# Allegro board DIF_1V0 - 副本.brd
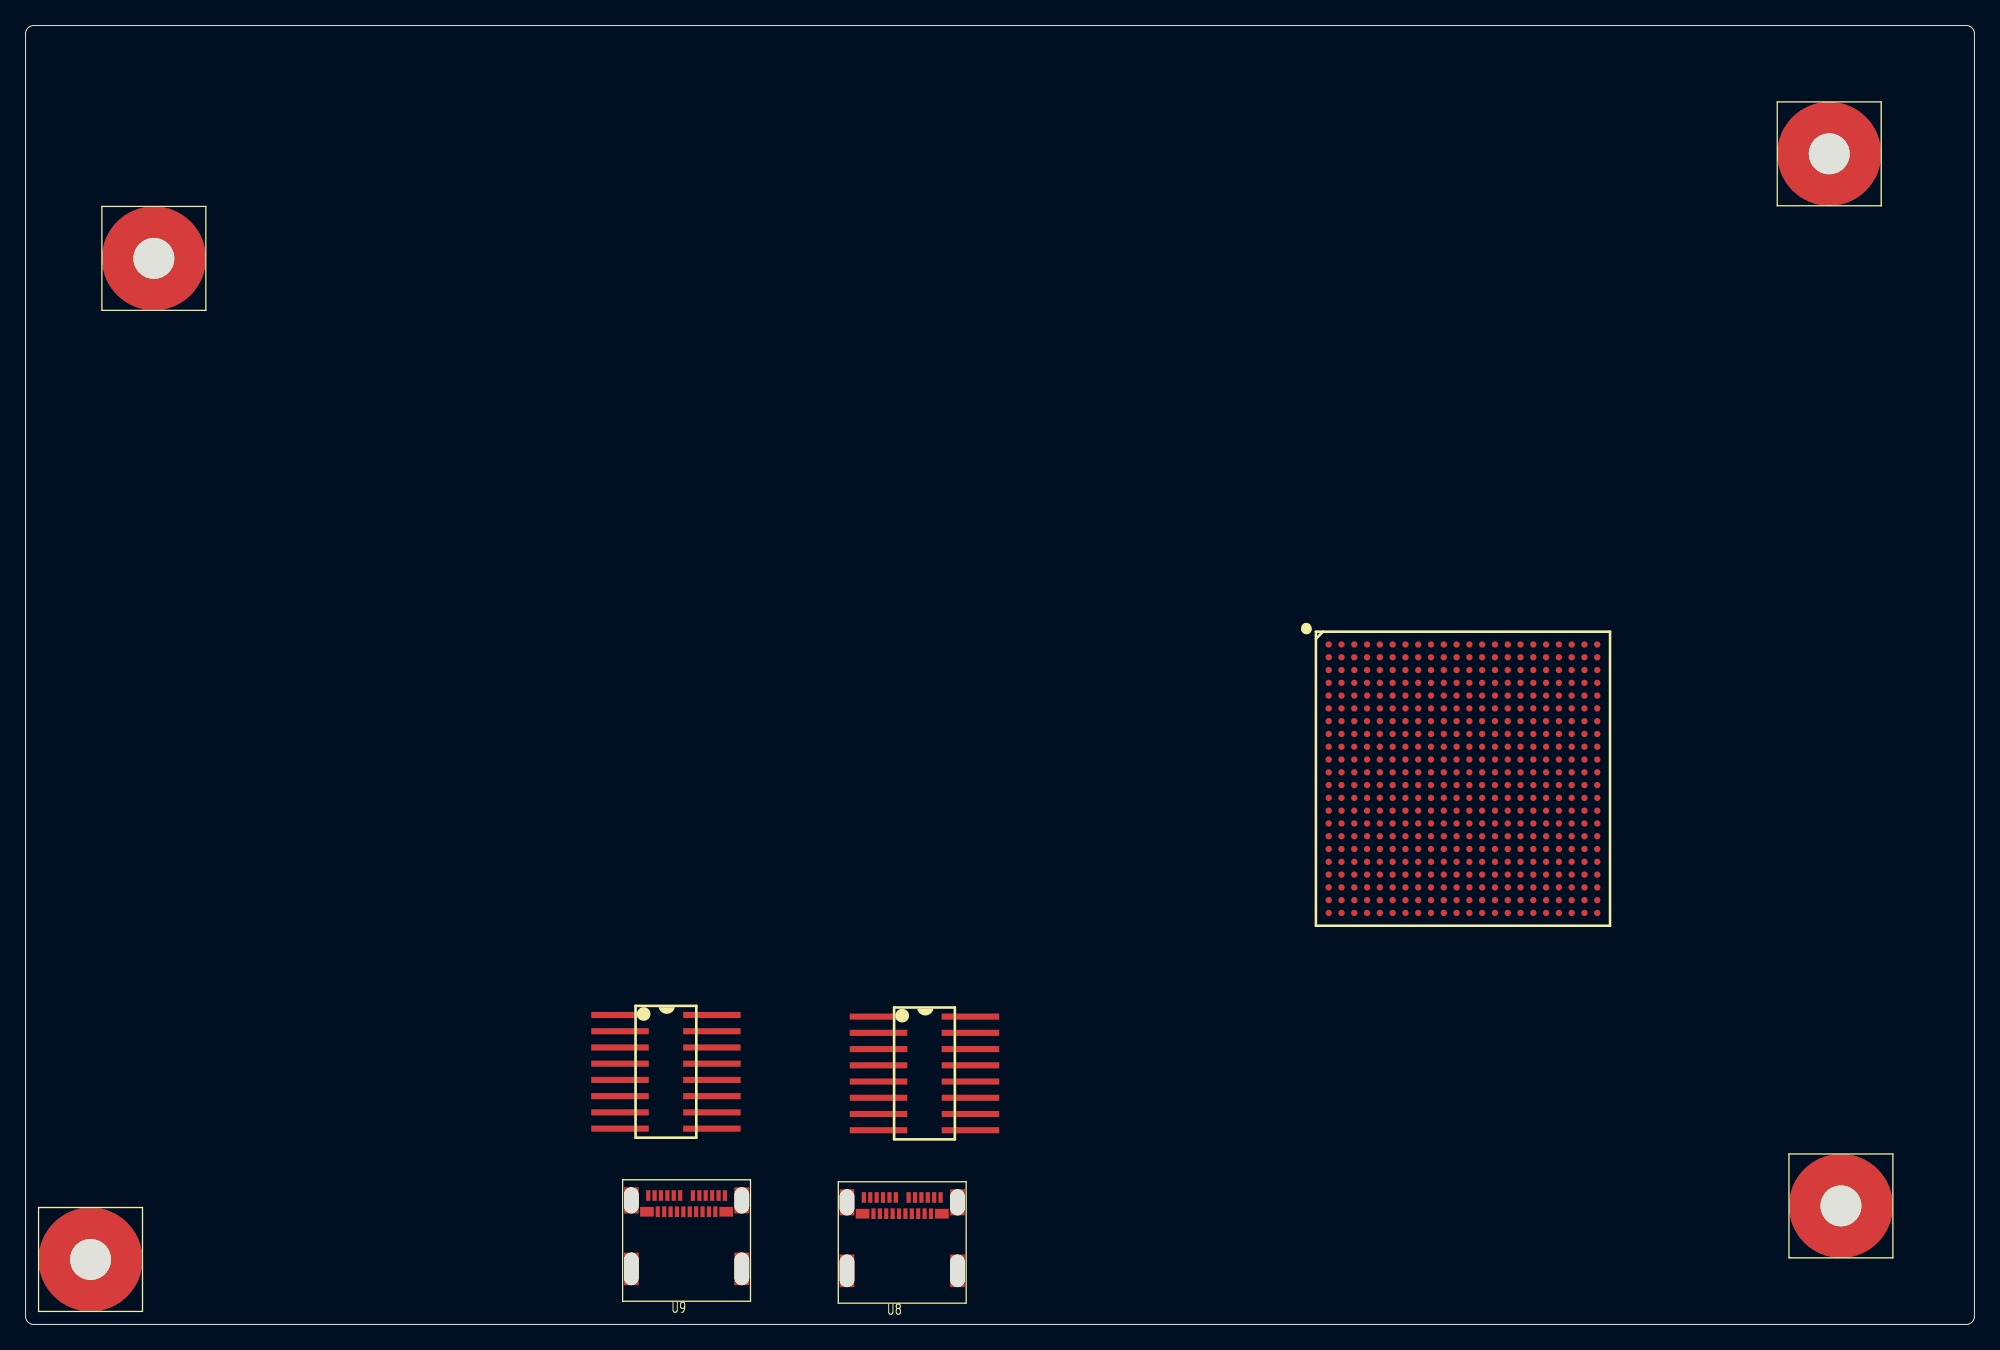
[diagram p0: board, top side]
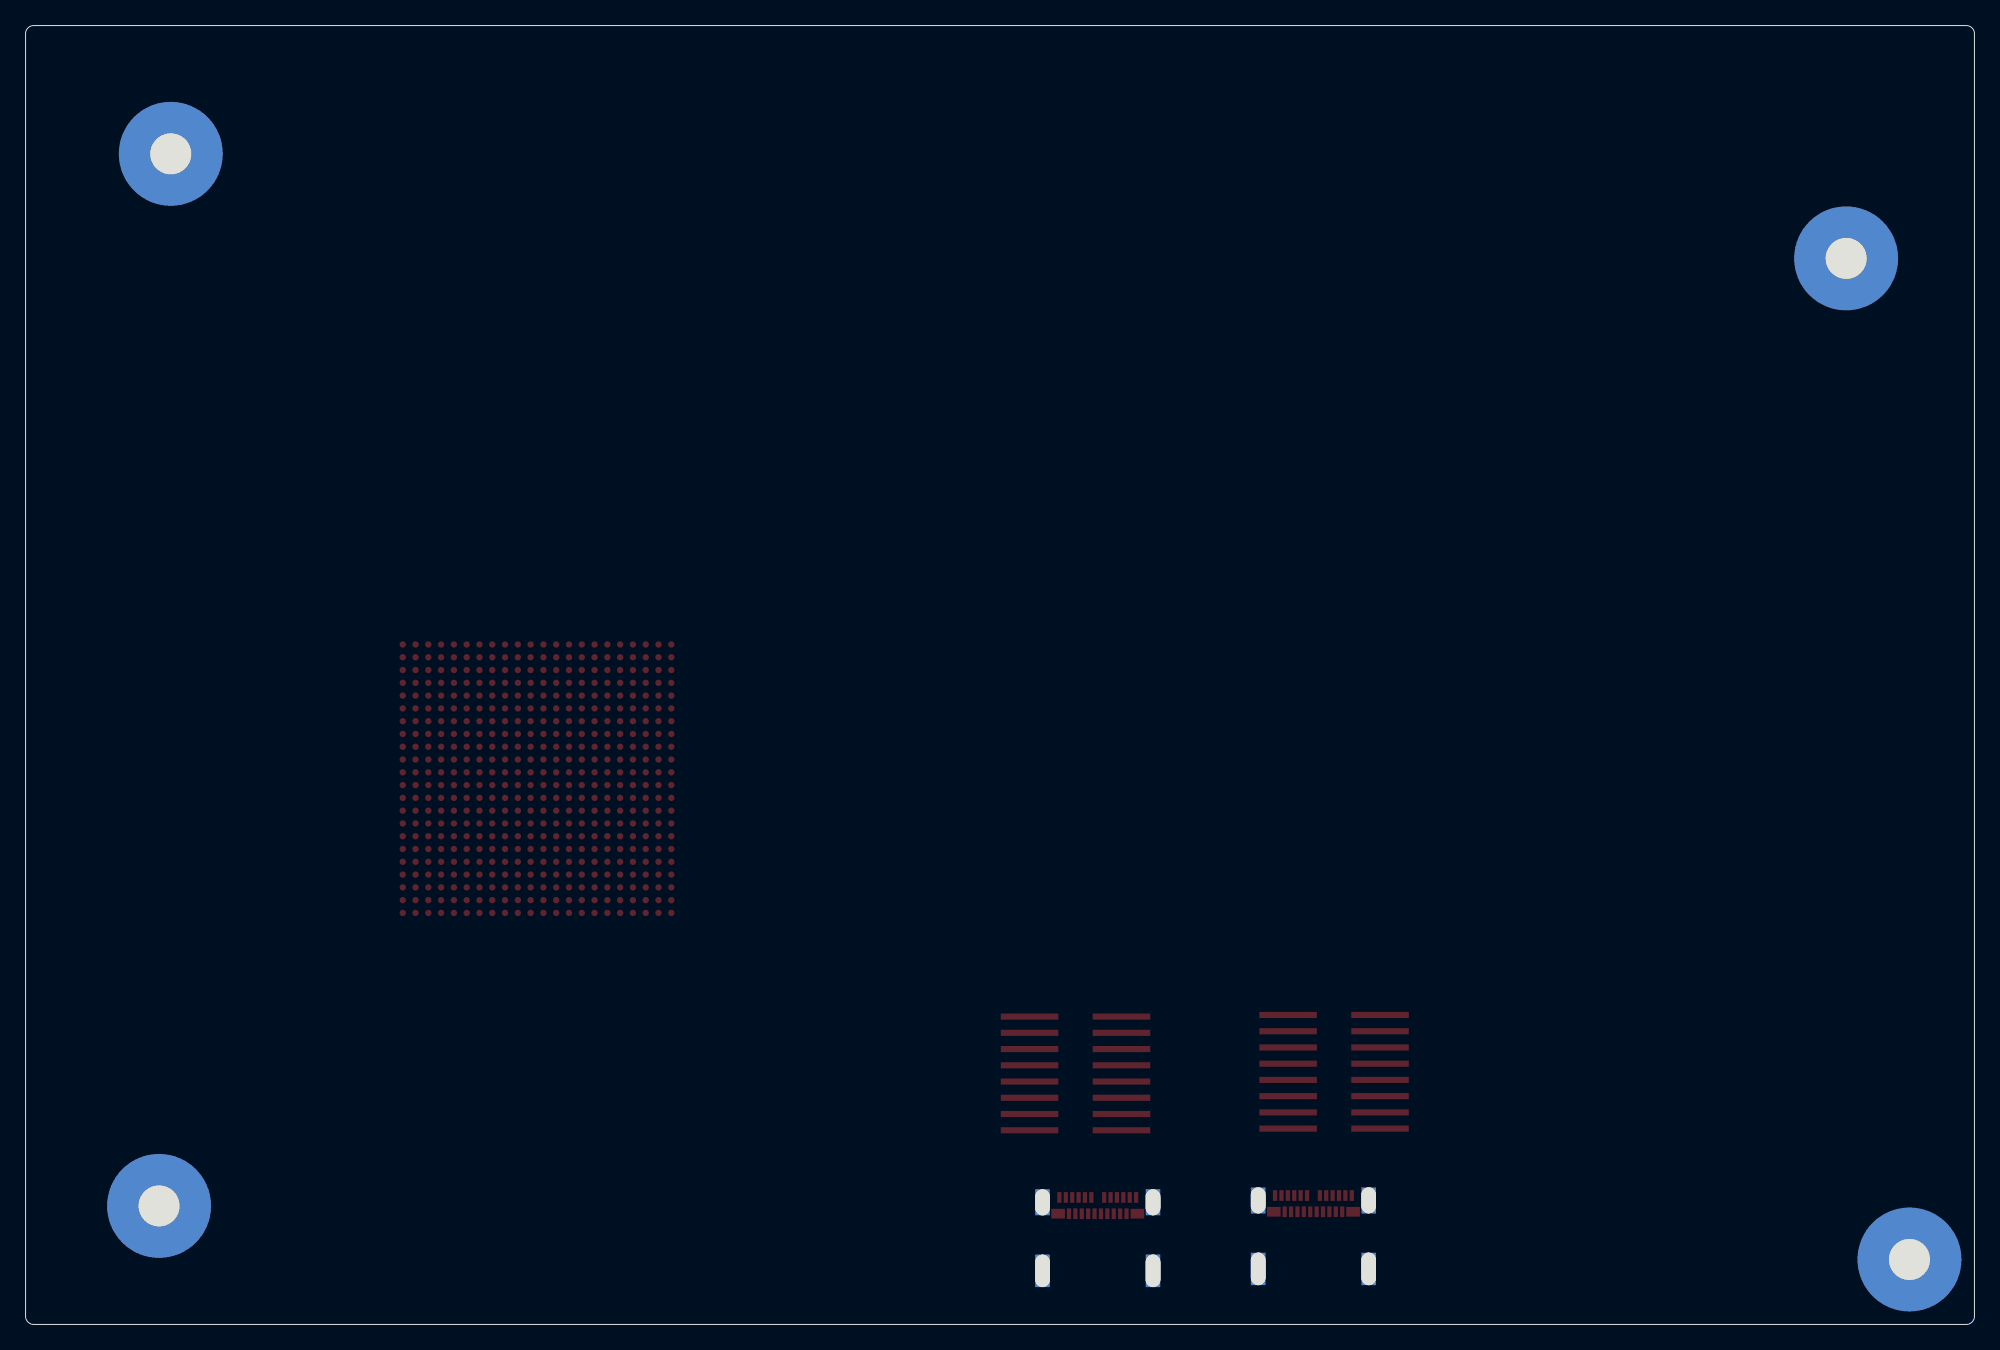
[diagram p1: board, bottom side, seen from below]

Outline 152.4 x 101.6 mm; copper layers: TOP, GND2, ART3, PLANE4, GND6, ART6, PLANE7, BOTTOM. Coordinates in mm from the lower left corner of the outline.
Outline path: 0,100.97 0,0.64 arc(0.19,0.19) 0.64,0 151.76,0 arc(152.21,0.19) 152.4,0.64 152.4,100.97 arc(152.21,101.41) 151.76,101.6 0.64,101.6 arc(0.19,101.41) 0,100.97

## Design rules (mm)
net group 1.2V: nets 1.2V N17024
net group IN_MONITOR: nets IN_MONITOR N16789996
net group IO_PRE_2.5_1: nets IO_PRE_2.5_1 N16790016
net group IO_PRE_2.5_2: nets IO_PRE_2.5_2 N16790125
net group IO_PRE_2.5_3: nets IO_PRE_2.5_3 N16790011
net group IO_PRE_2.5_4: nets IO_PRE_2.5_4 N16790120
net group IO_PRE_2.5_5: nets IO_PRE_2.5_5 N16790006
net group IO_PRE_2.5_6: nets IO_PRE_2.5_6 N16790115
net group IO_PRE_3.3_1: nets IO_PRE_3.3_1 N16783654
net group IO_PRE_3.3_2: nets IO_PRE_3.3_2 N1678375638
net group IO_PRE_3.3_3: nets IO_PRE_3.3_3 N16783650
net group IO_PRE_3.3_4: nets IO_PRE_3.3_4 N1678375636
net group IO_PRE_3.3_5: nets IO_PRE_3.3_5 N16783646
net group IO_PRE_3.3_6: nets IO_PRE_3.3_6 N1678375634
net group N65373: nets N65373 N607665
net group N606320: nets N65361 N606320
net group N16783572: nets N39711 N16783572
net group N16783577: nets N39253 N16783577
net group N16783581: nets N38992 N16783581
net group N16783585: nets N34554 N16783585
net group N16783590: nets N38404 N16783590
net group N16783594: nets N38396 N16783594
net group N16783603: nets N16783603 N16786967
net group N16783607: nets N40733 N16783607
net group N16783611: nets N42476 N16783611
net group N16783616: nets N42251 N16783616
net group N16783620: nets N41303 N16783620
net group N16783637: nets N16783637 N16787030
net group N16783642: nets N16783642 N16787037
net group N16789943: nets N16789943 N16790031
net group N16789945: nets N16789945 N16790036
net group N16789976: nets N33890 N16789976
net group N16789981: nets N28287 N16789981
net group N16789986: nets N27930 N16789986
net group N16789991: nets N27061 N16789991
net group N16790001: nets N29237 N16790001
net group N16790021: nets N72632 N16790021
net group N16790085: nets N33886 N16790085
net group N16790090: nets N27703 N16790090
net group N16790095: nets N26834 N16790095
net group N16790100: nets N73220 N16790100
net group N16790105: nets N29233 N16790105
net group N16790110: nets N71766 N16790110
net group N16790130: nets N16790130 N16790618
net group N16790140: nets N16790140 N16790622
net group N16790145: nets N16790145 N16790624
net group N167837560: nets N39940 N167837560
net group N167837562: nets N39482 N167837562
net group N167837564: nets N73812 N167837564
net group N167837566: nets N38635 N167837566
net group N167837568: nets N34550 N167837568
net group N1678375610: nets N38400 N1678375610
net group N1678375616: nets N40729 N1678375616
net group N1678375618: nets N16788925 N1678375618
net group N1678375620: nets N42480 N1678375620
net group N1678375622: nets N42028 N1678375622
net group N1678375628: nets N16788960 N1678375628
net group N1678375630: nets N64910 N1678375630
net group N1678375632: nets N16788974 N1678375632
net group OUT_CK_5N_1: nets N16790060 OUT_CK_5N_1
net group OUT_CK_5P_1: nets N16789951 OUT_CK_5P_1
net group OUT_CK_40N_1: nets N16790065 OUT_CK_40N_1
net group OUT_CK_40P_1: nets N16789956 OUT_CK_40P_1
net group OUT_RAZ_CHN_N_1: nets N16790080 OUT_RAZ_CHN_N_1
net group OUT_RAZ_CHN_P_1: nets N16789971 OUT_RAZ_CHN_P_1
net group OUT_TRIG_EXT_N_1: nets N16790075 OUT_TRIG_EXT_N_1
net group OUT_TRIG_EXT_P_1: nets N16789966 OUT_TRIG_EXT_P_1
net group OUT_VAL_EVT_N_1: nets N16790070 OUT_VAL_EVT_N_1
net group OUT_VAL_EVT_P_1: nets N16789961 OUT_VAL_EVT_P_1
net group SFP_RD: nets GTP0_RD+ GTP0_RD-
net group SFP_TD: nets GTP0_TD+ GTP0_TD-
net group 3.3V_OUT_DET: nets 3.3V_OUT_DET N16790041 N16790052 N16790150 N16790155
net group N16783598: nets N36779 N16783598 N1678375626
net group N16783624: nets N37008 N16783624 N1678375614
net group N16790026: nets N64906 N16790026 N16790135
net group N1678375612: nets N36552 N1678375612 N1678375624
net group VCC5V0_DET: nets N16783629 N16783633 VCC5V0_DET

## Placement (name value [footprint] x y rotation side)
J14  2mm_Hole  [2MM_HOLE]  5.08 5.08 0 top
J15  2mm_Hole  [2MM_HOLE]  141.96 9.27 0 top
J16  2mm_Hole  [2MM_HOLE]  141.05 91.57 0 top
J17  2mm_Hole  [2MM_HOLE]  10.03 83.39 0 top
U3  XC7A100T  [ARTIX7XCA100T484]  101.9 53.19 0 top
U8  USBTypeCPlug  [USB_TYPEC_PLUG_V1]  68.55 8.66 0 top
U9  USBTypeCPlug  [USB_TYPEC_PLUG_V1]  51.69 8.81 0 top
U10  SN65LVDS31D  [CFP16ANDSOIC16]  46.71 14.61 0 top
U11  SN65LVDS32D  [CFP16ANDSOIC16]  66.93 14.48 0 top

## Library data of the parts
J14-J17 = 2mm_Hole
U3 = XC7A100T
U8 U9 = USBTypeCPlug
U10 = SN65LVDS31_0
U11 = DS26LV32AT

## Footprints (pads in the part's own frame, mm; a bottom-side part is the same pattern mirrored in y, then rotated)
2MM_HOLE
  round 8.128 hole 3.2: 1(0,0)
ARTIX7XCA100T484
  round 0.5 smd: A1(0,0) A2(1,0) A3(2,0) A4(3,0) A5(4,0) A6(5,0) A7(6,0) A8(7,0) A9(8,0) A10(9,0) A11(10,0) A12(11,0) A13(12,0) A14(13,0) A15(14,0) A16(15,0) A17(16,0) A18(17,0) A19(18,0) A20(19,0) A21(20,0) A22(21,0) AA1(0,-20) AA2(1,-20) AA3(2,-20) AA4(3,-20) AA5(4,-20) AA6(5,-20) AA7(6,-20) AA8(7,-20) AA9(8,-20) AA10(9,-20) AA11(10,-20) AA12(11,-20) AA13(12,-20) AA14(13,-20) AA15(14,-20) AA16(15,-20) AA17(16,-20) AA18(17,-20) AA19(18,-20) AA20(19,-20) AA21(20,-20) AA22(21,-20) AB1(0,-21) AB2(1,-21) AB3(2,-21) AB4(3,-21) AB5(4,-21) AB6(5,-21) AB7(6,-21) AB8(7,-21) AB9(8,-21) AB10(9,-21) AB11(10,-21) AB12(11,-21) AB13(12,-21) AB14(13,-21) AB15(14,-21) AB16(15,-21) AB17(16,-21) AB18(17,-21) AB19(18,-21) AB20(19,-21) AB21(20,-21) AB22(21,-21) B1(0,-1) B2(1,-1) B3(2,-1) B4(3,-1) B5(4,-1) B6(5,-1) B7(6,-1) B8(7,-1) B9(8,-1) B10(9,-1) B11(10,-1) B12(11,-1) B13(12,-1) B14(13,-1) B15(14,-1) B16(15,-1) B17(16,-1) B18(17,-1) B19(18,-1) B20(19,-1) B21(20,-1) B22(21,-1) C1(0,-2) C2(1,-2) C3(2,-2) C4(3,-2) C5(4,-2) C6(5,-2) C7(6,-2) C8(7,-2) C9(8,-2) C10(9,-2) C11(10,-2) C12(11,-2) C13(12,-2) C14(13,-2) C15(14,-2) C16(15,-2) C17(16,-2) C18(17,-2) C19(18,-2) C20(19,-2) C21(20,-2) C22(21,-2) D1(0,-3) D2(1,-3) D3(2,-3) D4(3,-3) D5(4,-3) D6(5,-3) D7(6,-3) D8(7,-3) D9(8,-3) D10(9,-3) D11(10,-3) D12(11,-3) D13(12,-3) D14(13,-3) D15(14,-3) D16(15,-3) D17(16,-3) D18(17,-3) D19(18,-3) D20(19,-3) D21(20,-3) D22(21,-3) E1(0,-4) E2(1,-4) E3(2,-4) E4(3,-4) E5(4,-4) E6(5,-4) E7(6,-4) E8(7,-4) E9(8,-4) E10(9,-4) E11(10,-4) E12(11,-4) E13(12,-4) E14(13,-4) E15(14,-4) E16(15,-4) E17(16,-4) E18(17,-4) E19(18,-4) E20(19,-4) E21(20,-4) E22(21,-4) F1(0,-5) F2(1,-5) F3(2,-5) F4(3,-5) F5(4,-5) F6(5,-5) F7(6,-5) F8(7,-5) F9(8,-5) F10(9,-5) F11(10,-5) F12(11,-5) F13(12,-5) F14(13,-5) F15(14,-5) F16(15,-5) F17(16,-5) F18(17,-5) F19(18,-5) F20(19,-5) F21(20,-5) F22(21,-5) G1(0,-6) G2(1,-6) G3(2,-6) G4(3,-6) G5(4,-6) G6(5,-6) G7(6,-6) G8(7,-6) G9(8,-6) G10(9,-6) G11(10,-6) G12(11,-6) G13(12,-6) G14(13,-6) G15(14,-6) G16(15,-6) G17(16,-6) G18(17,-6) G19(18,-6) G20(19,-6) G21(20,-6) G22(21,-6) H1(0,-7) H2(1,-7) H3(2,-7) H4(3,-7) H5(4,-7) H6(5,-7) H7(6,-7) H8(7,-7) H9(8,-7) H10(9,-7) H11(10,-7) H12(11,-7) H13(12,-7) H14(13,-7) H15(14,-7) H16(15,-7) H17(16,-7) H18(17,-7) H19(18,-7) H20(19,-7) H21(20,-7) H22(21,-7) J1(0,-8) J2(1,-8) J3(2,-8) J4(3,-8) J5(4,-8) J6(5,-8) J7(6,-8) J8(7,-8) J9(8,-8) J10(9,-8) J11(10,-8) J12(11,-8) J13(12,-8) J14(13,-8) J15(14,-8) J16(15,-8) J17(16,-8) J18(17,-8) J19(18,-8) J20(19,-8) J21(20,-8) J22(21,-8) K1(0,-9) K2(1,-9) K3(2,-9) K4(3,-9) K5(4,-9) K6(5,-9) K7(6,-9) K8(7,-9) K9(8,-9) K10(9,-9) K11(10,-9) K12(11,-9) K13(12,-9) K14(13,-9) K15(14,-9) K16(15,-9) K17(16,-9) K18(17,-9) K19(18,-9) K20(19,-9) K21(20,-9) K22(21,-9) L1(0,-10) L2(1,-10) L3(2,-10) L4(3,-10) L5(4,-10) L6(5,-10) L7(6,-10) L8(7,-10) L9(8,-10) L10(9,-10) L11(10,-10) L12(11,-10) L13(12,-10) L14(13,-10) L15(14,-10) L16(15,-10) L17(16,-10) L18(17,-10) L19(18,-10) L20(19,-10) L21(20,-10) L22(21,-10) M1(0,-11) M2(1,-11) M3(2,-11) M4(3,-11) M5(4,-11) M6(5,-11) M7(6,-11) M8(7,-11) M9(8,-11) M10(9,-11) M11(10,-11) M12(11,-11) M13(12,-11) M14(13,-11) M15(14,-11) M16(15,-11) M17(16,-11) M18(17,-11) M19(18,-11) M20(19,-11) M21(20,-11) M22(21,-11) N1(0,-12) N2(1,-12) N3(2,-12) N4(3,-12) N5(4,-12) N6(5,-12) N7(6,-12) N8(7,-12) N9(8,-12) N10(9,-12) N11(10,-12) N12(11,-12) N13(12,-12) N14(13,-12) N15(14,-12) N16(15,-12) N17(16,-12) N18(17,-12) N19(18,-12) N20(19,-12) N21(20,-12) N22(21,-12) P1(0,-13) P2(1,-13) P3(2,-13) P4(3,-13) P5(4,-13) P6(5,-13) P7(6,-13) P8(7,-13) P9(8,-13) P10(9,-13) P11(10,-13) P12(11,-13) P13(12,-13) P14(13,-13) P15(14,-13) P16(15,-13) P17(16,-13) P18(17,-13) P19(18,-13) P20(19,-13) P21(20,-13) P22(21,-13) R1(0,-14) R2(1,-14) R3(2,-14) R4(3,-14) R5(4,-14) R6(5,-14) R7(6,-14) R8(7,-14) R9(8,-14) R10(9,-14) R11(10,-14) R12(11,-14) R13(12,-14) R14(13,-14) R15(14,-14) R16(15,-14) R17(16,-14) R18(17,-14) R19(18,-14) R20(19,-14) R21(20,-14) R22(21,-14) T1(0,-15) T2(1,-15) T3(2,-15) T4(3,-15) T5(4,-15) T6(5,-15) T7(6,-15) T8(7,-15) T9(8,-15) T10(9,-15) T11(10,-15) T12(11,-15) T13(12,-15) T14(13,-15) T15(14,-15) T16(15,-15) T17(16,-15) T18(17,-15) T19(18,-15) T20(19,-15) T21(20,-15) T22(21,-15) U1(0,-16) U2(1,-16) U3(2,-16) U4(3,-16) U5(4,-16) U6(5,-16) U7(6,-16) U8(7,-16) U9(8,-16) U10(9,-16) U11(10,-16) U12(11,-16) U13(12,-16) U14(13,-16) U15(14,-16) U16(15,-16) U17(16,-16) U18(17,-16) U19(18,-16) U20(19,-16) U21(20,-16) U22(21,-16) V1(0,-17) V2(1,-17) V3(2,-17) V4(3,-17) V5(4,-17) V6(5,-17) V7(6,-17) V8(7,-17) V9(8,-17) V10(9,-17) V11(10,-17) V12(11,-17) V13(12,-17) V14(13,-17) V15(14,-17) V16(15,-17) V17(16,-17) V18(17,-17) V19(18,-17) V20(19,-17) V21(20,-17) V22(21,-17) W1(0,-18) W2(1,-18) W3(2,-18) W4(3,-18) W5(4,-18) W6(5,-18) W7(6,-18) W8(7,-18) W9(8,-18) W10(9,-18) W11(10,-18) W12(11,-18) W13(12,-18) W14(13,-18) W15(14,-18) W16(15,-18) W17(16,-18) W18(17,-18) W19(18,-18) W20(19,-18) W21(20,-18) W22(21,-18) Y1(0,-19) Y2(1,-19) Y3(2,-19) Y4(3,-19) Y5(4,-19) Y6(5,-19) Y7(6,-19) Y8(7,-19) Y9(8,-19) Y10(9,-19) Y11(10,-19) Y12(11,-19) Y13(12,-19) Y14(13,-19) Y15(14,-19) Y16(15,-19) Y17(16,-19) Y18(17,-19) Y19(18,-19) Y20(19,-19) Y21(20,-19) Y22(21,-19)
CFP16ANDSOIC16
  rect 4.5x0.48 smd: 1(-0.229,9.601) 2(-0.229,8.331) 3(-0.229,7.061) 4(-0.229,5.791) 5(-0.229,4.521) 6(-0.229,3.251) 7(-0.229,1.981) 8(-0.229,0.711) 9(6.96,0.711) 10(6.96,1.981) 11(6.96,3.251) 12(6.96,4.521) 13(6.96,5.791) 14(6.96,7.061) 15(6.96,8.331) 16(6.96,9.601)
USB_TYPEC_PLUG_V1
  rect 1.143x2.032 hole 1.321x2.311 unplated: (-4.32,0.89) (4.32,0.89)
  rect 1.143x2.54 hole 1.321x2.794 unplated: (-4.32,-4.47) (4.32,-4.47)
  rect 0.33x0.838 smd: 1(-3,1.27) 2(-2.5,1.27) 3(-2,1.27) 4(-1.5,1.27) 5(-1,1.27) 6(-0.5,1.27) 7(0.5,1.27) 8(1,1.27) 9(1.5,1.27) 10(2,1.27) 11(2.5,1.27) 12(3,1.27) 14(2.25,0) 15(1.75,0) 16(1.25,0) 17(0.75,0) 18(0.25,0) 19(-0.25,0) 20(-0.75,0) 21(-1.25,0) 22(-1.75,0) 23(-2.25,0)
  rect 1.067x0.762 smd: 13(3.1,0) 24(-3.1,0)

## Nets
1.0V: U3.D6(MGTAVCC_1) U3.D10(MGTAVCC_2) U3.E8(MGTAVCC_5) U3.F7(MGTAVCC_3) U3.F9(MGTAVCC_4) U3.H8(VCCINT#H8) U3.H10(VCCINT#H10) U3.J7(VCCINT#J7) U3.J9(VCCINT#J9) U3.J11(VCCBRAM#J11) U3.K8(VCCINT#K8) U3.L7(VCCINT#L7) U3.L11(VCCBRAM#L11) U3.M8(VCCINT#M8) U3.N7(VCCINT#N7) U3.N11(VCCBRAM#N11) U3.P8(VCCINT#P8) U3.P10(VCCINT#P10) U3.R7(VCCINT#R7) U3.R9(VCCINT#R9) U3.T8(VCCINT#T8) U3.T10(VCCINT#T10)
1.2V: U3.B5(MGTAVTT_1) U3.B7(MGTAVTT_2) U3.B9(MGTAVTT_3) U3.B11(MGTAVTT_4) U3.C4(MGTAVTT_5) U3.C8(MGTAVTT_6)
1.8V: U3.H12(VCCAUX#H12) U3.K12(VCCAUX#K12) U3.M12(VCCAUX#M12) U3.P12(VCCAUX#P12) U3.R11(VCCAUX#R11)
2.5V: U3.AA17(VCCO_13_1) U3.AB14(VCCO_13_2) U3.C1(VCCO_35_1) U3.F2(VCCO_35_2) U3.G19(VCCO_15_1) U3.H6(VCCO_35_3) U3.H16(VCCO_15_2) U3.J3(VCCO_35_4) U3.J13(VCCO_15_3) U3.K20(VCCO_15_4) U3.L17(VCCO_15_5) U3.M4(VCCO_35_5) U3.N1(VCCO_35_6) U3.N21(VCCO_15_6) U3.V16(VCCO_13_3) U3.W13(VCCO_13_4) U3.Y10(VCCO_13_5)
3.3V: U3.A17(VCCO_16_1) U3.AA7(VCCO_34_1) U3.AB4(VCCO_34_2) U3.B14(VCCO_16_2) U3.C21(VCCO_16_3) U3.D18(VCCO_16_4) U3.E15(VCCO_16_5) U3.F12(VCCO_0_1) U3.F22(VCCO_16_6) U3.M14(VCCO_14_1) U3.P18(VCCO_14_2) U3.R5(VCCO_34_3) U3.R15(VCCO_14_3) U3.T2(VCCO_34_4) U3.T12(VCCO_0_2) U3.T22(VCCO_14_4) U3.U8(CFGBVS_0) U3.U11(M0_0) U3.U19(VCCO_14_5) U3.V6(VCCO_34_5) U3.W3(VCCO_34_6) U3.Y20(VCCO_14_6) U10.4(G) U10.16(VCC) U11.4(EN) U11.16(VCC)
VCCADC: U3.K10(VCCADC_0)
0: J14.1(GND) J15.1(GND) J16.1(GND) J17.1(GND) U3.A2(GND#A2) U3.A3(GND#A3) U3.A5(GND#A5) U3.A7(GND#A7) U3.A9(GND#A9) U3.A11(GND#A11) U3.A12(GND#A12) U3.A22(GND#A22) U3.AA2(GND#AA2) U3.AA12(GND#AA12) U3.AA22(GND#AA22) U3.AB9(GND#AB9) U3.AB19(GND#AB19) U3.B3(GND#B3) U3.B12(GND#B12) U3.B19(GND#B19) U3.C3(GND#C3) U3.C6(GND#C6) U3.C10(GND#C10) U3.C12(GND#C12) U3.C16(GND#C16) U3.D3(GND#D3) U3.D4(GND#D4) U3.D8(GND#D8) U3.D12(GND#D12) U3.D13(GND#D13) U3.E4(GND#E4) U3.E5(GND#E5) U3.E7(GND#E7) U3.E9(GND#E9) U3.E11(GND#E11) U3.E12(VCCBATT_0) U3.E20(GND#E20) U3.F5(GND#F5) U3.F11(GND#F11) U3.F17(GND#F17) U3.G5(GND#G5) U3.G6(GND#G6) U3.G7(GND#G7) U3.G8(GND#G8) U3.G9(GND#G9) U3.G10(GND#G10) U3.G12(GND#G12) U3.G14(GND#G14) U3.H1(GND#H1) U3.H7(GND#H7) U3.H9(GND#H9) U3.H11(GND#H11) U3.H21(GND#H21) U3.J8(GND#J8) U3.J10(GND#J10) U3.J12(GND#J12) U3.J18(GND#J18) U3.K5(GND#K5) U3.K7(GND#K7) U3.K9(GNDADC_0) U3.K11(GND#K11) U3.K15(GND#K15) U3.L2(GND#L2) U3.L8(GND#L8) U3.L9(VREFN_0) U3.L10(VP_0) U3.L22(GND#L22) U3.M7(GND#M7) U3.M9(VN_0) U3.M10(VREFP_0) U3.M11(GND#M11) U3.M19(GND#M19) U3.N6(GND#N6) U3.N8(GND#N8) U3.N9(DXN_0) U3.N10(DXP_0) U3.N16(GND#N16) U3.P3(GND#P3) U3.P7(GND#P7) U3.P9(GND#P9) U3.P11(GND#P11) U3.P13(GND#P13) U3.R8(GND#R8) U3.R10(GND#R10) U3.R12(GND#R12) U3.R20(GND#R20) U3.T7(GND#T7) U3.T9(GND#T9) U3.T11(GND#T11) U3.T17(GND#T17) U3.U4(GND#U4) U3.U10(M1_0) U3.U14(GND#U14) U3.U22(IO_L3P_T0_DQS_PUDC_B_14) U3.V1(GND#V1) U3.V11(GND#V11) U3.V21(GND#V21) U3.W8(GND#W8) U3.W18(GND#W18) U3.Y5(GND#Y5) U3.Y15(GND#Y15) U8.1(A1 GND) U8.12(A12 GND) U8.13(B1 GND) U8.24(B12 GND) U9.1(A1 GND) U9.12(A12 GND) U9.13(B1 GND) U9.24(B12 GND) U10.8(GND) U10.12(/G) U11.8(GND) U11.12(EN*)
CCLK: U3.L12(CCLK_0)
DONE: U3.G11(DONE_0)
FIFOADR0: U3.W17(IO_L16N_T2_A15_D31_14)
FIFOADR1: U3.V17(IO_L16P_T2_CSI_B_14)
FLASH_CS_B: U3.T19(IO_L6P_T0_FCS_B_14)
FLASH_DQ0: U3.P22(IO_L1P_T0_D00_MOSI_14)
FLASH_DQ1: U3.R22(IO_L1N_T0_D01_DIN_14)
FLASH_DQ2: U3.P21(IO_L2P_T0_D02_14)
FLASH_DQ3: U3.R21(IO_L2N_T0_D03_14)
FPGA_LED1: U3.E14(IO_L4N_T0_16)
FPGA_LED2: U3.E16(IO_L5P_T0_16)
FPGA_LED3: U3.D16(IO_L5N_T0_16)
FPGA_LED4: U3.D14(IO_L6P_T0_16)
FPGA_LED5: U3.D15(IO_L6N_T0_VREF_16)
FPGA_LED6: U3.B15(IO_L7P_T1_16)
FPGA_LED7: U3.B16(IO_L7N_T1_16)
FPGA_LED8: U3.C13(IO_L8P_T1_16)
IN_DATA_1+: U8.6(D_P A) U8.18(D_P B) U11.2(R1+)
IN_DATA_1-: U8.7(D_N A) U8.19(D_N B) U11.1(R1-)
IN_DATA_5+: U9.2(TX1_P) U9.14(TX2_P) U11.6(R2+)
IN_DATA_5-: U9.3(TX1_N) U9.15(TX2_N) U11.7(R2-)
IN_DATA_6+: U9.11(RX2_P) U9.23(RX1_P) U11.10(R3+)
IN_DATA_6-: U9.10(RX2_N) U9.22(RX1_N) U11.9(R3-)
IN_MONITOR: U3.J2(IO_L9N_T1_DQS_AD7N_35)
IN_TX_HV: U3.AB6(IO_L20N_T3_34)
INIT_B: U3.U12(INIT_B_0)
IO_PRE_2.5_1: U3.M2(IO_L16N_T2_35)
IO_PRE_2.5_2: U3.M3(IO_L16P_T2_35)
IO_PRE_2.5_3: U3.L1(IO_L15N_T2_DQS_35)
IO_PRE_2.5_4: U3.M1(IO_L15P_T2_DQS_35)
IO_PRE_2.5_5: U3.K3(IO_L14N_T2_SRCC_35)
IO_PRE_2.5_6: U3.L3(IO_L14P_T2_SRCC_35)
IO_PRE_3.3_1: U3.V5(IO_L16N_T2_34)
IO_PRE_3.3_2: U3.U6(IO_L16P_T2_34)
IO_PRE_3.3_3: U3.W5(IO_L15N_T2_DQS_34)
IO_PRE_3.3_4: U3.W6(IO_L15P_T2_DQS_34)
IO_PRE_3.3_5: U3.U5(IO_L14N_T2_SRCC_34)
IO_PRE_3.3_6: U3.T5(IO_L14P_T2_SRCC_34)
IO_SMA1: U3.B20(IO_L16P_T2_16)
IO_SMA2: U3.A20(IO_L16N_T2_16)
IO_SMA3: U3.A18(IO_L17P_T2_16)
IO_SMA4: U3.H19(IO_L12N_T1_MRCC_15)
IO_SMA5: U3.K18(IO_L13P_T2_MRCC_15)
M2: U3.U9(M2_0)
OUT_DATA_2+: U8.2(TX1_P) U8.14(TX2_P) U10.2(1Y)
OUT_DATA_2-: U8.3(TX1_N) U8.15(TX2_N) U10.3(1Z)
OUT_DATA_3+: U8.11(RX2_P) U8.23(RX1_P) U10.6(2Y)
OUT_DATA_3-: U8.10(RX2_N) U8.22(RX1_N) U10.5(2Z)
OUT_DATA_4+: U9.6(D_P A) U9.18(D_P B) U10.10(3Y)
OUT_DATA_4-: U9.7(D_N A) U9.19(D_N B) U10.11(3Z)
OUT_RX_HV: U3.AB7(IO_L20P_T3_34)
PROGRAM_B: U3.N12(PROGRAM_B_0)
TRG_EXT: U3.A13(IO_L10P_T1_16)
USB_CLKOUT: U3.U17(IO_L18P_T2_A12_D28_14)
USB_FD0: U3.U18(IO_L18N_T2_A11_D27_14)
USB_FD1: U3.R14(IO_L19N_T3_A09_D25_VREF_14)
USB_FD2: U3.R18(IO_L20P_T3_A08_D24_14)
USB_FD3: U3.T18(IO_L20N_T3_A07_D23_14)
USB_FD4: U3.N17(IO_L21P_T3_DQS_14)
USB_FD5: U3.P17(IO_L21N_T3_DQS_A06_D22_14)
USB_FD6: U3.P15(IO_L22P_T3_A05_D21_14)
USB_FD7: U3.R16(IO_L22N_T3_A04_D20_14)
USB_FD8: U3.N13(IO_L23P_T3_A03_D19_14)
USB_FD9: U3.N14(IO_L23N_T3_A02_D18_14)
USB_FD10: U3.P16(IO_L24P_T3_A01_D17_14)
USB_FD11: U3.R17(IO_L24N_T3_A00_D16_14)
USB_FD12: U3.N15(IO_25_14)
USB_FD13: U3.W21(IO_L7P_T1_D09_14)
USB_FD14: U3.W22(IO_L7N_T1_D10_14)
USB_FD15: U3.AA20(IO_L8P_T1_D11_14)
USB_FLAGA: U3.W19(IO_L12P_T1_MRCC_14)
USB_FLAGB: U3.W20(IO_L12N_T1_MRCC_14)
USB_FLAGC: U3.Y18(IO_L13P_T2_MRCC_14)
USB_FLAGD/SLCS#: U3.Y19(IO_L13N_T2_MRCC_14)
USB_IFCLK: U3.V20(IO_L11N_T1_SRCC_14)
USB_PKTEND: U3.AB20(IO_L15N_T2_DQS_DOUT_CSO_B_14)
USB_SLOE: U3.V18(IO_L14P_T2_SRCC_14)
USB_SLRD: U3.V19(IO_L14N_T2_SRCC_14)
USB_SLWR: U3.AA19(IO_L15P_T2_DQS_RDWR_B_14)
USB_WAKEUP: U3.AA18(IO_L17P_T2_A14_D30_14)
USB_WU2: U3.AB18(IO_L17N_T2_A13_D29_14)
N12327: U3.T13(TMS_0)
N12331: U3.V12(TCK_0)
N12335: U3.U13(TDO_0)
N12339: U3.R13(TDI_0)
N12485: U3.AA16(IO_L1N_T0_13) U11.3(DO1)
N12489: U3.Y17(IO_0_13) U11.5(DO2)
N12493: U3.Y16(IO_L1P_T0_13) U11.11(DO3)
N12742: U3.AB17(IO_L2N_T0_13) U10.1(1A)
N12746: U3.AA15(IO_L4P_T0_13) U10.7(2A)
N12750: U3.AB15(IO_L4N_T0_13) U10.9(3A)
N15768: U3.F15(IO_0_16)
N15772: U3.F13(IO_L1P_T0_16)
N15776: U3.F14(IO_L1N_T0_16)
N15834: U3.F16(IO_L2P_T0_16)
N15838: U3.E17(IO_L2N_T0_16)
N16065: U3.B8(MGTPRXP0_216)
N16069: U3.A8(MGTPRXN0_216)
N16073: U3.B4(MGTPTXP0_216)
N16077: U3.A4(MGTPTXN0_216)
N17024: U3.F8(MGTRREF_216)
N26834: U3.E1(IO_L3P_T0_DQS_AD5P_35)
N27061: U3.D1(IO_L3N_T0_DQS_AD5N_35)
N27703: U3.C2(IO_L2P_T0_AD12P_35)
N27930: U3.B2(IO_L2N_T0_AD12N_35)
N28287: U3.A1(IO_L1N_T0_AD4N_35)
N29233: U3.G3(IO_L11N_T1_SRCC_35)
N29237: U3.J5(IO_L10P_T1_AD15P_35)
N31078: U3.G15(IO_L2P_T0_AD8P_15)
N31082: U3.G16(IO_L2N_T0_AD8N_15)
N31695: U3.H13(IO_L1P_T0_AD0P_15)
N31699: U3.G13(IO_L1N_T0_AD0N_15)
N31992: U3.J22(IO_L7P_T1_AD2P_15)
N31996: U3.H22(IO_L7N_T1_AD2N_15)
N32289: U3.J14(IO_L3P_T0_DQS_AD1P_15)
N32293: U3.H14(IO_L3N_T0_DQS_AD1N_15)
N33117: U3.G17(IO_L4P_T0_15)
N33121: U3.G18(IO_L4N_T0_15)
N33886: U3.B1(IO_L1P_T0_AD4P_35)
N33890: U3.F4(IO_0_35)
N34550: U3.W2(IO_L4P_T0_34)
N34554: U3.R2(IO_L3N_T0_DQS_34)
N36552: U3.U3(IO_L6P_T0_34)
N36779: U3.V3(IO_L6N_T0_VREF_34)
N37008: U3.AA1(IO_L7P_T1_34)
N38396: U3.Y1(IO_L5N_T0_34)
N38400: U3.W1(IO_L5P_T0_34)
N38404: U3.Y2(IO_L4N_T0_34)
N38635: U3.R3(IO_L3P_T0_DQS_34)
N38992: U3.V2(IO_L2N_T0_34)
N39253: U3.U2(IO_L2P_T0_34)
N39482: U3.U1(IO_L1N_T0_34)
N39711: U3.T1(IO_L1P_T0_34)
N39940: U3.T3(IO_0_34)
N40729: U3.AB1(IO_L7N_T1_34)
N40733: U3.AB3(IO_L8P_T1_34)
N41303: U3.AB5(IO_L10N_T1_34)
N42028: U3.AA5(IO_L10P_T1_34)
N42251: U3.AA3(IO_L9N_T1_DQS_34)
N42476: U3.Y3(IO_L9P_T1_DQS_34)
N42480: U3.AB2(IO_L8N_T1_34)
N63573: U3.E6(MGTREFCLK0N_216)
N65349: U3.F6(MGTREFCLK0P_216)
N65361: U3.E19(IO_L14P_T2_SRCC_16)
N65373: U3.D19(IO_L14N_T2_SRCC_16)
N71766: U3.G1(IO_L5P_T0_AD13P_35)
N72632: U3.D2(IO_L4N_T0_35)
N73220: U3.E2(IO_L4P_T0_35)
N73812: U3.Y4(IO_L11P_T1_SRCC_34)
N15095890: U3.J15(IO_L5P_T0_AD9P_15)
N15095902: U3.H15(IO_L5N_T0_AD9N_15)
N15095914: U3.H17(IO_L6P_T0_15)
N15095926: U3.H18(IO_L6N_T0_VREF_15)
N15095962: U3.H20(IO_L8P_T1_AD10P_15)
N15095974: U3.G20(IO_L8N_T1_AD10N_15)
N15096494: U3.F1(IO_L5N_T0_AD13N_35)
N15096498: U3.F3(IO_L6P_T0_35)
N15096550: U3.E3(IO_L6N_T0_VREF_35)
N15096554: U3.K1(IO_L7P_T1_AD6P_35)
N15096558: U3.J1(IO_L7N_T1_AD6N_35)
N15096562: U3.H2(IO_L8P_T1_AD14P_35)
N15096566: U3.G2(IO_L8N_T1_AD14N_35)
N15096570: U3.K2(IO_L9P_T1_DQS_AD7P_35)
N15096630: U3.H5(IO_L10N_T1_AD15N_35)
N15096634: U3.H3(IO_L11P_T1_SRCC_35)
N15096642: U3.H4(IO_L12P_T1_MRCC_35)
N15097499: U3.G4(IO_L12N_T1_MRCC_35)
N15097511: U3.K4(IO_L13P_T2_MRCC_35)
N15097523: U3.J4(IO_L13N_T2_MRCC_35)
N15105749: U3.P14(IO_L19P_T3_A10_D26_14)
N15110693: U3.AB16(IO_L2P_T0_13)
N15136085: U3.B13(IO_L8N_T1_16)

Pads without a net: U3 A6 A10 A14 A15 A16 A19 A21 AA4 AA6 AA8 AA9 AA10 AA11 AA13 AA14 AA21 AB8 AB10 AB11 AB12 AB13 AB21 AB22 B6 B10 B17 B18 B21 B22 C5 C7 C9 C11 C14 C15 C17 C18 C19 C20 C22 D5 D7 D9 D11 D17 D20 D21 D22 E10 E13 E18 E21 E22 F10 F18 F19 F20 F21 G21 G22 J6 J16 J17 J19 J20 J21 K6 K13 K14 K16 K17 K19 K21 K22 L4 L5 L6 L13 L14 L15 L16 L18 L19 L20 L21 M5 M6 M13 M15 M16 M17 M18 M20 M21 M22 N2 N3 N4 N5 N18 N19 N20 N22 P1 P2 P4 P5 P6 P19 P20 R1 R4 R6 R19 T4 T6 T14 T15 T16 T20 T21 U7 U15 U16 U20 U21 V4 V7 V8 V9 V10 V13 V14 V15 V22 W4 W7 W9 W10 W11 W12 W14 W15 W16 Y6 Y7 Y8 Y9 Y11 Y12 Y13 Y14 Y21 Y22; U8 4 5 8 9 16 17 20 21; U9 4 5 8 9 16 17 20 21; U10 13 14 15; U11 13 14 15
